# EAGLE board input_switch (EAGLE 6.5.0)
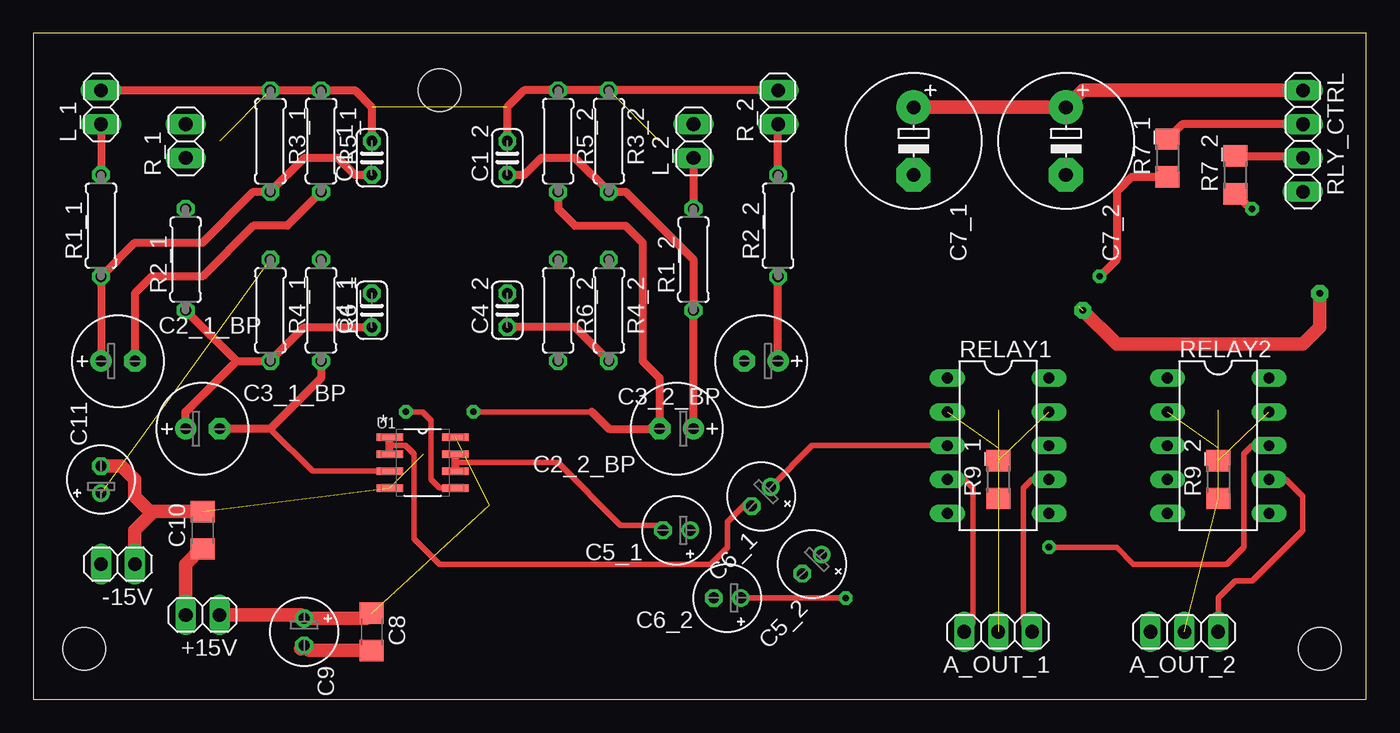
[diagram p0: board, top side]
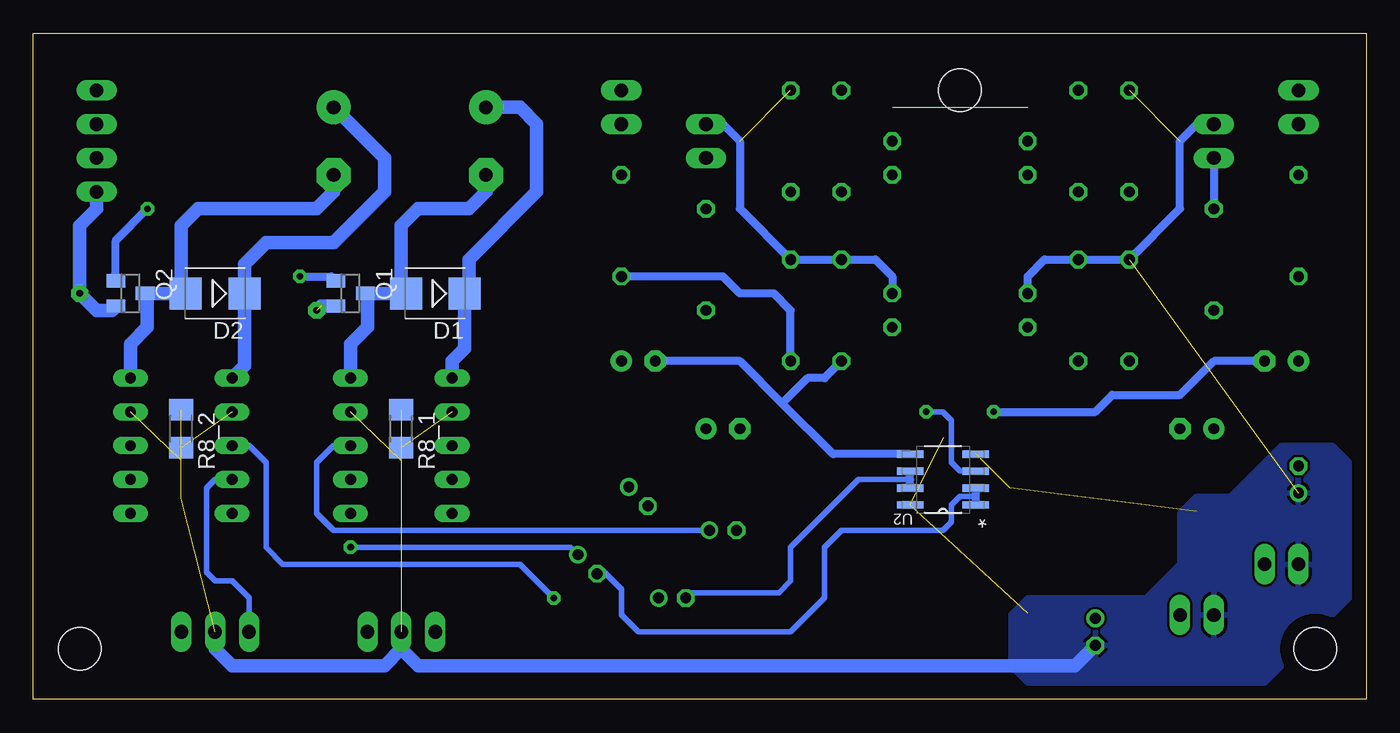
[diagram p1: board, bottom side, seen from below]

Size 100 x 50 mm. Coordinates in mm from the lower left corner, seen from the top.
Outline: 0,0 100,0 100,50 0,50 0,0
Copper layers (1*16): Top 0.035mm / dielectric 1.5mm / Bottom 0.035mm
Design rules "default": minimum track width 10mil, minimum drill 24mil, track to track 8mil, track to pad 8mil, pad to pad 8mil, via to via 8mil, smd to smd 8mil, copper to edge 40mil, drill to drill 8mil, minimum pad ring 10mil, minimum via ring 8mil, stop-mask expansion 4mil, vias tented up to drill 0mil, thermal gap 10mil
Holes 3.2 mm at 3.81,3.81 96.52,3.81 30.48,45.72

## Footprints (pad centres in the part's own frame; a part is rotated, then mirrored left to right if it is on the bottom)
1X02 = drill 1.016 long: 1 -1.27,0; 2 1.27,0
1X03 = drill 1.016 long: 1 -2.54,0; 2 0,0; 3 2.54,0
C025-024X044 = drill 0.813 octagon: 1 -1.27,0; 2 1.27,0
E2,5-7 = drill 0.813 pad 1.6: + -1.27,0 | drill 0.813 pad 1.6 octagon: - 1.27,0
E2-5 = drill 0.813 pad 1.27: + -1.016,0 | drill 0.813 pad 1.27 octagon: - 1.016,0
E5-10,5 = drill 1.016 pad 2.54: + -2.54,0 | drill 1.016 pad 2.54 octagon: - 2.54,0
C1206 = smd 1.6 x 1.8: 1 -1.4,0; 2 1.4,0
SMB = smd 2.4 x 2.4: A 2.2,0; C -2.2,0
SOT23 = smd 1 x 1.4: 1 -0.95,-1.1; 2 0.95,-1.1; 3 0,1.1
0207/7 = drill 0.813 octagon: 1 -3.81,0; 2 3.81,0
R1206 = smd 1.6 x 1.803: 1 -1.422,0; 2 1.422,0
DIL10 = drill 0.813 long: 1 -5.08,-3.81; 2 -2.54,-3.81; 3 0,-3.81; 4 2.54,-3.81; 5 5.08,-3.81; 6 5.08,3.81; 7 2.54,3.81; 8 0,3.81; 9 -2.54,3.81; 10 -5.08,3.81
1X04 = drill 1.016 long: 1 -3.81,0; 2 -1.27,0; 3 1.27,0; 4 3.81,0
SOIC127P600X175-8N = smd 1.981 x 0.559: 1 -2.464,1.905; 2 -2.464,0.635; 3 -2.464,-0.635; 4 -2.464,-1.905; 5 2.464,-1.905; 6 2.464,-0.635; 7 2.464,0.635; 8 2.464,1.905

## Placement (x,y rotation side)
+15V  [1X02]  12.7,6.35 180 top
-15V  [1X02]  6.35,10.16 180 top
A_OUT_1  [1X03]  72.39,5.08 180 top
A_OUT_2  [1X03]  86.36,5.08 180 top
C1_1  220p  [C025-024X044]  25.4,40.64 90 top
C1_2  220p  [C025-024X044]  35.56,40.64 90 top
C2_1_BP  10u  [E2,5-7]  6.35,25.4 0 top
C2_2_BP  10u  [E2,5-7]  48.26,20.32 180 top
C3_1_BP  10u  [E2,5-7]  12.7,20.32 0 top
C3_2_BP  10u  [E2,5-7]  54.61,25.4 180 top
C4_1  220p  [C025-024X044]  25.4,29.21 90 top
C4_2  220p  [C025-024X044]  35.56,29.21 90 top
C5_1  47u  [E2-5]  48.26,12.7 180 top
C5_2  47u  [E2-5]  58.42,10.16 225 top
C6_1  47u  [E2-5]  54.61,15.24 225 top
C6_2  47u  [E2-5]  52.07,7.62 180 top
C7_1  220u  [E5-10,5]  66.04,41.91 270 top
C7_2  220u  [E5-10,5]  77.47,41.91 270 top
C8  [C1206]  25.4,5.08 270 top
C9  [E2-5]  20.32,5.08 270 top
C10  [C1206]  12.7,12.7 90 top
C11  [E2-5]  5.08,16.51 90 top
D1  ES2D  [SMB]  69.85,30.48 180 bottom
D2  ES2D  [SMB]  86.36,30.48 180 bottom
L_1  [1X02]  5.08,44.45 90 top
L_2  [1X02]  49.53,41.91 90 top
Q1  [SOT23]  76.2,30.48 270 bottom
Q2  [SOT23]  92.71,30.48 270 bottom
R1_1  100  [0207/7]  5.08,35.56 90 top
R1_2  100  [0207/7]  49.53,33.02 90 top
R2_1  100  [0207/7]  11.43,33.02 90 top
R2_2  100  [0207/7]  55.88,35.56 90 top
R3_1  220k  [0207/7]  17.78,41.91 270 top
R3_2  220k  [0207/7]  43.18,41.91 270 top
R4_1  220k  [0207/7]  17.78,29.21 270 top
R4_2  220k  [0207/7]  43.18,29.21 270 top
R5_1  100k  [0207/7]  21.59,41.91 270 top
R5_2  100k  [0207/7]  39.37,41.91 270 top
R6_1  100k  [0207/7]  21.59,29.21 270 top
R6_2  100k  [0207/7]  39.37,29.21 270 top
R7_1  100  [R1206]  85.09,40.64 90 top
R7_2  100  [R1206]  90.17,39.37 90 top
R8_1  220k  [R1206]  72.39,20.32 270 bottom
R8_2  220k  [R1206]  88.9,20.32 270 bottom
R9_1  220k  [R1206]  72.39,16.51 90 top
R9_2  220k  [R1206]  88.9,16.51 90 top
R_1  [1X02]  11.43,41.91 90 top
R_2  [1X02]  55.88,44.45 90 top
RELAY1  [DIL10]  72.39,19.05 270 top
RELAY2  [DIL10]  88.9,19.05 270 top
RLY_CTRL  [1X04]  95.25,41.91 270 top
U1  NE5532AD8G  [SOIC127P600X175-8N]  29.21,17.78 0 top
U2  NE5532AD8G  [SOIC127P600X175-8N]  31.75,16.51 180 bottom

## Library data of the parts
+15V -15V A_OUT_1 A_OUT_2 L_1 L_2 R_1 R_2 RLY_CTRL = pinhead
C1_1 C1_2 C2_1_BP C2_2_BP C3_1_BP C3_2_BP C4_1 C4_2 C5_1 C5_2 C6_1 C6_2 C7_1 C7_2 C8-C11 R1_1 R1_2 R2_1 R2_2 R3_1 R3_2 R4_1 R4_2 R5_1 R5_2 R6_1 R6_2 R7_1 R7_2 R8_1 R8_2 R9_1 R9_2 = rcl
D1 D2 = diode
Q1 Q2 = semicon-smd-ipc
RELAY1 RELAY2 = ic-package
U1 U2 = ne5532; MPN: NE5532AD8G; OC_FARNELL: 1426379; OC_NEWARK: 42K2208; PACKAGE: SOIC-8; SUPPLIER: ON Semiconductor

## Nets
+15V: +15V.1 C8.1 C9.+ U1.8 U2.8
-15V: -15V.1 C10.2 C11.- U1.4 U2.4
GND: +15V.2 -15V.2 A_OUT_1.2 A_OUT_2.2 C1_1.2 C1_2.2 C4_1.2 C4_2.2 C8.2 C9.- C10.1 C11.+ L_1.2 L_2.2 R3_1.1 R3_2.1 R4_1.1 R4_2.1 R5_1.1 R5_2.1 R6_1.1 R6_2.1 R8_1.1 R8_2.1 R9_1.1 R9_2.1 R_1.2 R_2.2
N$1: R2_1.2 R_1.1
N$2: L_1.1 R1_1.2
N$3: C1_1.1 C2_1_BP.+ R1_1.1 R3_1.2
N$4: C2_1_BP.- R5_1.2 U1.5
N$5: C5_1.- U1.6 U1.7
N$6: C3_1_BP.+ C4_1.1 R2_1.1 R4_1.2
N$7: C6_1.- U1.1 U1.2
N$8: C6_1.+ RELAY1.3
N$9: A_OUT_1.3 RELAY1.4
N$10: C6_2.- U2.6 U2.7
N$11: R8_1.2 RELAY1.2
N$12: R9_1.2 RELAY1.9
N$13: C5_2.- U2.1 U2.2
N$15: R7_1.2 RLY_CTRL.2
N$16: Q1.1 R7_1.1
N$18: C7_1.- D1.A Q1.3 RELAY1.10
N$19: A_OUT_2.1 RELAY2.7
N$20: C3_1_BP.- R6_1.2 U1.3
N$21: R2_2.2 R_2.1
N$22: L_2.1 R1_2.2
N$23: C1_2.1 C2_2_BP.+ R1_2.1 R3_2.2
N$24: C3_2_BP.+ C4_2.1 R2_2.1 R4_2.2
N$25: A_OUT_1.1 RELAY1.7
N$26: C3_2_BP.- R6_2.2 U2.5
N$27: C2_2_BP.- R5_2.2 U2.3
N$28: A_OUT_2.3 RELAY2.4
N$29: C6_2.+ RELAY2.3
N$30: C5_2.+ RELAY2.8
N$31: C5_1.+ RELAY1.8
N$32: R7_2.2 RLY_CTRL.3
N$34: R8_2.2 RELAY2.2
N$35: R9_2.2 RELAY2.9
N$37: C7_1.+ C7_2.+ D1.C D2.C RELAY1.1 RELAY2.1 RLY_CTRL.1
N$38: C7_2.- D2.A Q2.3 RELAY2.10
N$39: Q2.1 R7_2.1
N$40: Q1.2 Q2.2 RLY_CTRL.4

## Tracks (layer width: path | path; a pad name or v marks a point on that pad's centre or on a via)
+15V  (2 unrouted)
  Top 1.016: +15V.1 20.07,6.35 C9.+ 25.02,6.1 C8.1
-15V  (2 unrouted)
  Top 1.016: C10.2 9.02,14.1 8.89,13.97 | 8.89,13.97 7.62,12.7 -15V.1 | C11.- 6.6,17.53 7.62,16.51 7.62,15.24 8.89,13.97
GND  (8 unrouted)
  Top 0.61: L_1.2 R3_1.1 R5_1.1 24.13,45.72 25.4,44.45 C1_1.2 | R_2.2 R3_2.1 R5_2.1 36.83,45.72 35.56,44.45 C1_2.2
  Top 1.016: C10.1 12.57,11.3 11.43,10.16 +15V.2 | 20.07,3.81 C9.- 20.7,3.68 C8.2
  Bottom 0.61: C4_1.2 25.4,31.75 24.13,33.02 R6_1.1 R4_1.1 13.97,36.83 13.97,41.91 12.7,43.18 R_1.2 | L_2.2 48.26,43.18 46.99,41.91 46.99,36.83 R4_2.1 R6_2.1 36.83,33.02 35.56,31.75 C4_2.2
  Bottom 1.016: C9.- 21.84,2.54 71.12,2.54 72.39,3.81 | 72.39,3.81 A_OUT_1.2 | A_OUT_2.2 86.36,3.81 85.09,2.54 73.66,2.54 72.39,3.81
  pour Bottom: 6.35,19.05 2.54,19.05 1.27,17.78 1.27,7.62 7.62,1.27 25.4,1.27 26.67,2.54 26.67,6.35 25.4,7.62 16.51,7.62 13.97,10.16 13.97,13.97 12.7,15.24 10.16,15.24
N$1
  Bottom 0.61: R_1.1 R2_1.2
N$2
  Top 0.61: L_1.1 R1_1.2
N$3
  Top 0.61: C2_1_BP.+ R1_1.1 7.62,34.29 12.7,34.29 16.51,38.1 R3_1.2 20.32,40.64 22.86,40.64 24.13,39.37 C1_1.1
N$4  (via drill 0.5 pad 1.02)
  Top 0.406: v27.94,21.59 29.21,21.59 29.84,20.95 29.84,16.51 30.48,15.88 U1.5
  Top 0.61: R5_1.2 19.05,35.56 16.51,35.56 12.7,31.75 8.89,31.75 7.62,30.48 C2_1_BP.-
  Bottom 0.61: C2_1_BP.- 11.43,25.4 13.97,22.86 19.05,22.86 20.32,21.59 v27.94,21.59
N$5
  Top 0.406: 31.67,17.78 39.37,17.78 44.07,13.08 46.86,13.08 C5_1.-
  Top 0.61: U1.7 31.67,17.78 U1.6
N$6
  Top 0.61: R2_1.1 15.24,25.4 | 15.24,25.4 R4_1.2 20.32,27.94 C4_1.1 | C3_1_BP.+ 11.43,21.59 15.24,25.4
N$7
  Top 0.406: 26.67,19.05 26.75,19.05 27.94,19.05 28.57,18.41 28.57,12.06 30.48,10.16 50.8,10.16 52.07,11.43 52.07,13.34 53.34,14.61 53.81,14.61 C6_1.-
  Top 0.61: U1.2 26.75,19.05 U1.1
N$8
  Top 0.406: C6_1.+ 58.42,19.05 RELAY1.3
N$9
  Top 0.406: RELAY1.4 69.85,16.51 70.48,15.88 70.48,5.71 A_OUT_1.3
N$10
  Bottom 0.406: C6_2.- 50.67,8 44.07,8 43.18,8.89 43.18,11.43 38.1,16.51 34.21,16.51
  Bottom 0.61: U2.7 34.21,16.51 U2.6
N$11  (1 unrouted)
N$12  (1 unrouted)
N$13
  Bottom 0.406: 29.29,15.24 30.48,15.24 31.11,14.61 31.11,13.34 31.75,12.7 39.37,12.7 40.64,11.43 40.64,7.62 43.18,5.08 54.61,5.08 55.88,6.35 55.88,8.26 57.15,9.53 57.62,9.53 C5_2.-
  Bottom 0.61: U2.1 29.29,15.24 U2.2
N$15
  Top 0.61: RLY_CTRL.2 86.21,43.18 R7_1.2
N$16  (via drill 0.5 pad 1.02)
  Top 0.61: R7_1.1 82.4,39.22 81.28,38.1 81.28,33.02 v80.01,31.75
  Bottom 0.61: v80.01,31.75 77.62,31.75 Q1.1
N$18
  Bottom 1.016: C7_1.- 66.04,38.1 67.31,36.83 71.12,36.83 72.39,35.56 72.39,30.82 D1.A Q1.3 74.93,30.31 74.93,27.94 76.2,26.67 RELAY1.10
N$19
  Top 0.406: RELAY2.7 93.98,16.51 95.25,15.24 95.25,12.7 91.44,8.89 90.17,8.89 88.9,7.62 A_OUT_2.1
N$20
  Top 0.406: U1.3 20.95,17.14 17.78,20.32
  Top 0.61: R6_1.2 21.59,24.13 17.78,20.32 C3_1_BP.-
N$21
  Top 0.61: R2_2.2 R_2.1
N$22
  Top 0.61: L_2.1 R1_2.2
N$23
  Top 0.61: C2_2_BP.+ R1_2.1 49.53,33.02 44.45,38.1 R3_2.2 40.64,40.64 38.1,40.64 36.83,39.37 C1_2.1
N$24
  Top 0.61: C3_2_BP.+ R2_2.1 | R4_2.2 40.64,27.94 C4_2.1
  Bottom 0.61: R4_2.2 43.18,29.21 44.45,30.48 46.99,30.48 48.26,31.75 R2_2.1
N$25
  Top 0.406: RELAY1.7 74.93,16.51 74.3,15.88 74.3,5.71 A_OUT_1.1
N$26
  Bottom 0.61: U2.5 40.01,18.41 43.81,22.23 | 43.81,22.23 46.99,25.4 C3_2_BP.- | R6_2.2 40.64,24.13 41.91,24.13 43.81,22.23
N$27  (via drill 0.5 pad 1.02)
  Top 0.406: v33.02,21.59 41.91,21.59
  Top 0.61: 41.91,21.59 43.18,20.32 C2_2_BP.- 46.99,24.13 45.72,25.4 45.72,34.29 44.45,35.56 40.64,35.56 39.37,36.83 R5_2.2
  Bottom 0.406: U2.3 30.48,17.14 31.11,17.78 31.11,20.95 31.75,21.59 v33.02,21.59
N$28
  Bottom 0.406: RELAY2.4 86.36,16.51 87,15.88 87,9.53 86.36,8.89 85.09,8.89 83.82,7.62 A_OUT_2.3
N$29  (via drill 0.5 pad 1.02)
  Top 0.406: C6_2.+ v60.96,7.62
  Bottom 0.406: v60.96,7.62 63.5,10.16 81.28,10.16 82.55,11.43 82.55,17.78 83.82,19.05 RELAY2.3
N$30  (via drill 0.5 pad 1.02)
  Top 0.406: v76.2,11.43 81.28,11.43 82.55,10.16 89.53,10.16 90.81,11.43 90.81,18.41 91.44,19.05 RELAY2.8
  Bottom 0.406: C5_2.+ 59.69,11.43 v76.2,11.43
N$31
  Bottom 0.406: C5_1.+ 77.47,12.7 78.74,13.97 78.74,17.78 77.47,19.05 RELAY1.8
N$32
  Top 0.61: R7_2.2 95.1,40.79 RLY_CTRL.3
N$34  (1 unrouted)
N$35  (1 unrouted)
N$37
  Top 1.016: RLY_CTRL.1 78.74,45.72 C7_2.+ C7_1.+
  Bottom 1.016: C7_2.+ 73.66,40.64 73.66,38.1 77.47,34.29 82.55,34.29 84.16,32.68 D2.C 84.16,25.06 RELAY2.1 | C7_1.+ 63.5,44.45 62.23,43.18 62.23,38.1 67.31,33.02 67.31,30.82 D1.C 67.65,26.33 68.58,25.4 RELAY1.1
N$38
  Bottom 1.016: C7_2.- 77.47,38.1 78.74,36.83 87.63,36.83 88.9,35.56 88.9,30.82 D2.A Q2.3 91.44,30.31 91.44,27.94 92.71,26.67 RELAY2.10
N$39  (via drill 0.5 pad 1.02)
  Top 0.61: v91.44,36.83 91.29,36.83 R7_2.1
  Bottom 0.61: Q2.1 93.81,34.46 v91.44,36.83
N$40  (via drill 0.5 pad 1.27)  (1 unrouted)
  Top 1.016: v78.74,29.21 81.28,26.67 95.25,26.67 96.52,27.94 v96.52,30.48
  Bottom 1.016: RLY_CTRL.4 95.25,36.83 96.52,35.56 v96.52,30.48 95.25,29.21 94.13,29.21 Q2.2 | Q1.2 78.42,29.53